# Altium PCB TOP24x_24V_FLYBACK.PcbDoc
Units mm, origin at the board's own origin, x right, y up, seen from the top; angles counter-clockwise.
Board outline 130 x 55 mm, 2 copper layers (Top Layer, Bottom Layer), stack 1.571 mm thick; 41 components, 26 nets, 110 pads, 0 vias.
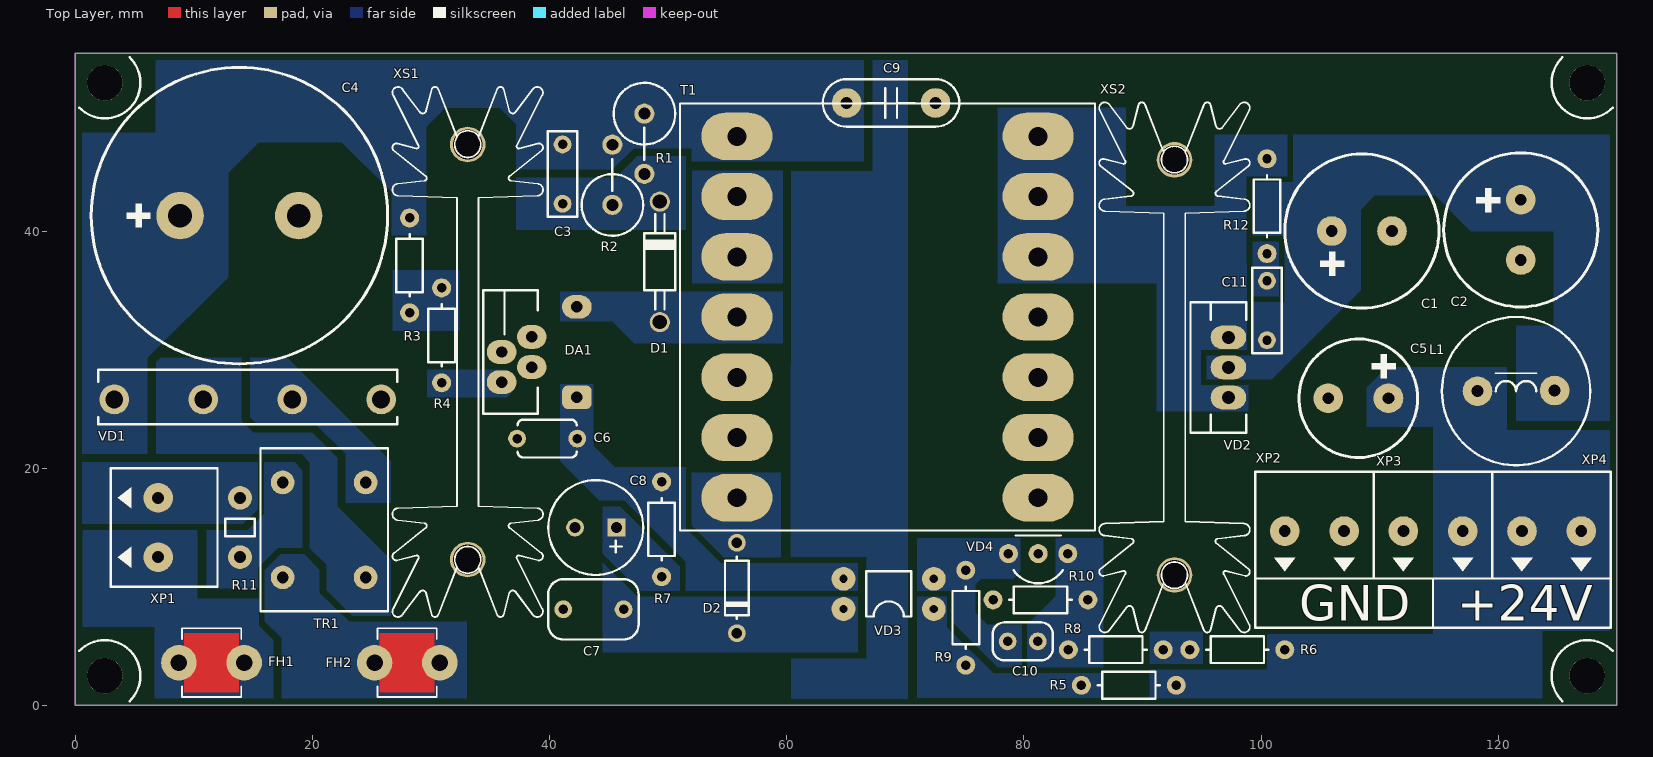
[diagram p0: Top Layer view]
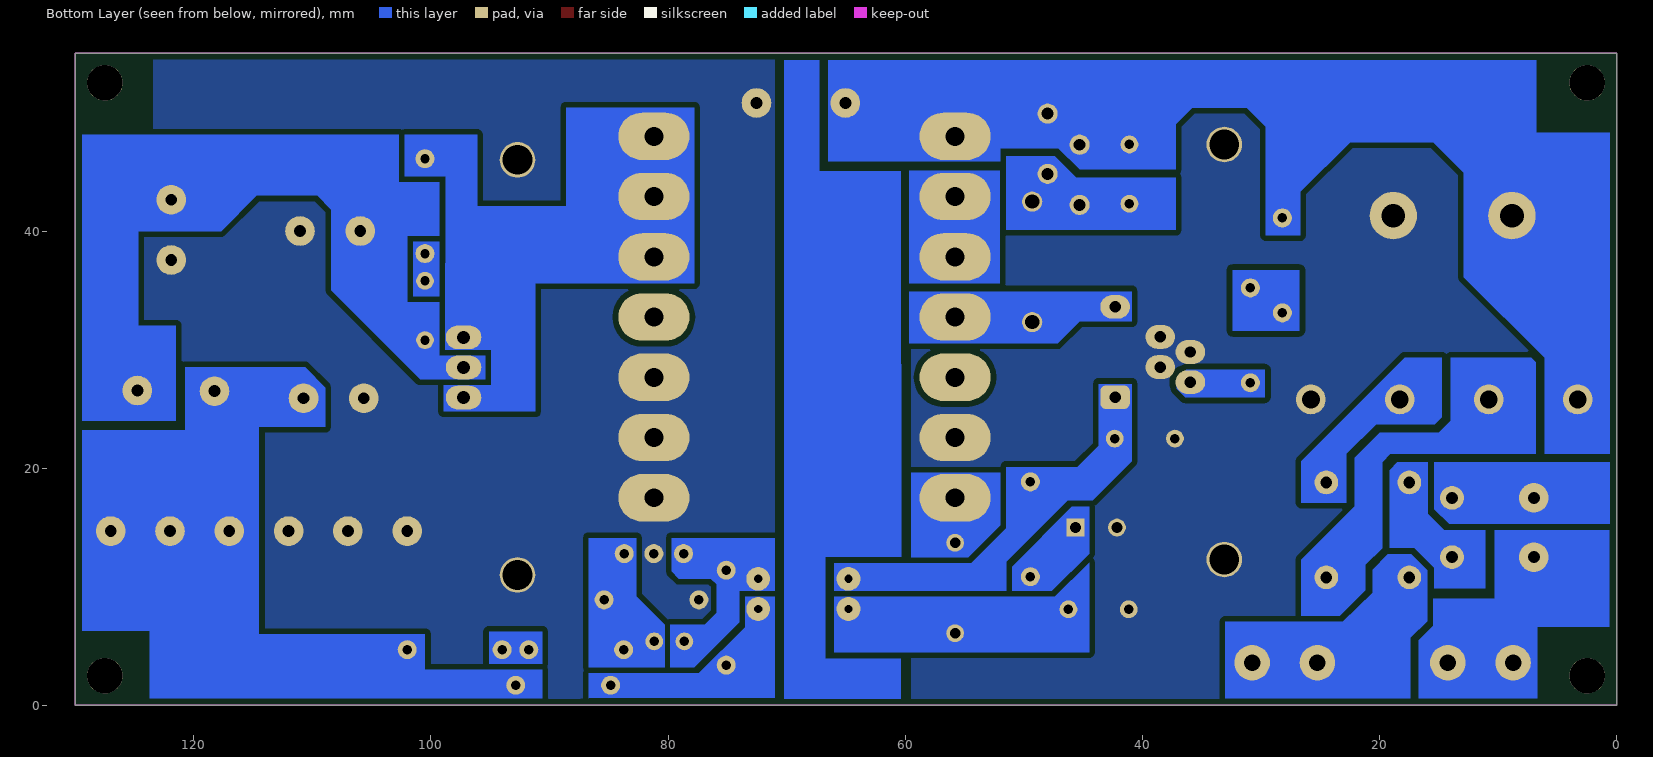
[diagram p1: Bottom Layer view, seen from below]

## Layer stack, top to bottom
Top Solder: solder mask 0.0102, Solder Resist, Dk 3.5
Top Layer: signal copper 0.0356
Dielectric 1: dielectric 1.5, FR-4, Dk 4.8
Bottom Layer: signal copper 0.0356
Bottom Solder: solder mask 0.0102, Solder Resist, Dk 3.5

## Board outline
0,0 0,55 130,55 130,0

## Design rules (kind name [scope] priority, off if disabled: settings)
Clearance Clearance_1 [All vs IsRegion] p1: gap=0.5
Clearance [All] p2: gap=0.3
Height [All] p1: minheight=0 maxheight=50 prefheight=12.7
PlaneConnect [All] p1: planeconnectstyle=Direct reliefexpansion=0.508 reliefentries=4 reliefconductorwidth=0.254 reliefairgap=0.254
PolygonConnect [All] p1: connectstyle=Direct reliefconductorwidth=0.254 reliefentries=4 polygonreliefangle="90 Angle" airgapwidth=0.254
RoutingVias [All] p1: holewidth=0.711 width=1.27 viastyle="Through Hole" minholewidth=0.711 minwidth=1.27 maxholewidth=0.711 maxwidth=1.27
SolderMaskExpansion [All] p1: expansion=0.102
Width [All] p1: maxlimit=2 minlimit=0.25 preferedwidth=0.5
27 further rules are at their usual default settings.

## Components (designator, comment, footprint, x,y, rotation, side; value= is the part's Value field where it differs from the comment)
C1 "1000uF" CAP_EL_13_20_VERT 108.5,40 r180 top
C2 "1000uF" CAP_EL_13_20_VERT 121.9,40.1 r90 top
C3 "1nF" CAPR500-250X720X650 41.1,44.8 r90 top
C4 "220uF" CAP_EL_25_40_VERT 13.85,41.3 r180 top
C5 "470uF" CAP_EL_10_19_VERT 108.2,25.9 r0 top
C6 "100nF" CAPRR508-350X500X500 39.8,22.5 r180 top
C7 "1uF" CAPRR508-508X762X914 43.7,8.1 r0 top
C8 "47uF" CAPPR350-800X1150 43.9,15 r180 top
C9 "1nF" CAP_7.5MM_Y 68.8,50.8 r0 top
C10 "33nF" CAPRR254-318X508X660 79.9,5.4 r180 top
C11 "1nF" CAPR500-250X720X650 100.5,33.3 r90 top
D1 "1N4007" DO-41 49.3,37.4 r270 top
D2 "1N4148" DO-35 55.8,9.9 r90 top
DA1 "TOP248YN" TO-220-7 38.5,29.8 r270 top
FH1 "ZH266" ZH266 11.5,3.6 r180 top
FH2 "ZH266" ZH266 28,3.6 r0 top
L1 "4.7uH" SL1016 121.5,26.5 r180 top
R1 "22k" RESADV508-1670X520 48,49.9 r270 top
R2 "22k" RESADV508-1670X520 45.3,42.2 r90 top
R3 "1M" RES_AXIAL_0_25_8 28.2,37.1 r90 top
R4 "1M" RES_AXIAL_0_25_8 30.9,31.2 r90 top
R5 "1k6" RES_AXIAL_0_25_8 88.85,1.7 r0 top
R6 "47k" RES_AXIAL_0_25_8 98,4.7 r180 top
R7 "10" RES_AXIAL_0_25_8 49.45,14.85 r90 top
R8 "33k" RES_AXIAL_0_25_8 87.75,4.7 r0 top
R9 "1k" RES_AXIAL_0_25_8 75.1,7.4 r270 top
R10 "10k" RES_AXIAL_0_25_8 81.4,8.9 r0 top
R11 "10R" B57164K 13.9,15 r270 top
R12 "5R6" RES_AXIAL_0_25_8 100.5,42.1 r270 top
T1 "ETD29" ETD29 68.5,32.75 r0 top
TR1 "22mH" CG00008A 21,14.8 r90 top
VD1 "D3SBA60" D3SBAXX 14.55,25.8 r0 top
VD2 "CTL22S" TO-220-3 97.25,28.5 r90 top
VD3 "PC817" DIP4 68.6,9.4 r180 top
VD4 "LM431AIM3" TO92 81.2,12.8 r0 top
XP1 "306-021-12" 306-021-12 7,15 r270 top
XP2 "306-021-12" 306-021-12 104.5,14.7 r0 top
XP3 "306-021-12" 306-021-12 114.5,14.7 r0 top
XP4 "306-021-12" 306-021-12 124.5,14.7 r0 top
XS1 "SK45-25S" SK45-25S 33.1,29.8 r90 top
XS2 "SK45-25S" SK45-25S 92.7,28.5 r90 top

## Footprints (in the part's own frame and the unit in brackets; to place one, negate y for a bottom-side part, rotate by r counter-clockwise, add the part's x,y. Pads: shape width x height; smd on the part's side, far side on the other; paste and mask are expansions set on the pad)
306-021-12 [mm]
  round 2.5 hole 1 unplated: 1(-2.5,0) 2(2.5,0)
  silkscreen extent -5,-4 5,5, body extent -5,-4 5,5, height 12.62
B57164K [mm]
  round 2 hole 1: 1(-2.5,0) 2(2.5,0)
  silkscreen extent -0.75,-1.25 0.75,1.25, body extent -4,-1.25 4,1.26, height 10.5
CAP_7.5MM_Y [mm]
  round 2.5 hole 1: 1(-3.75,0) 2(3.75,0)
  silkscreen extent -5.75,-2 5.75,2, body extent -6,-1.99 6,1.99, height 15.31
CAP_EL_10_19_VERT [mm]
  round 2.5 hole 1: 1(2.54,0) 2(-2.54,0)
  silkscreen extent -5,-5 5,5, body extent -5.08,-5.07 5.08,5.07, height 20.33
CAP_EL_13_20_VERT [mm]
  round 2.5 hole 1: 1(2.54,0) 2(-2.54,0)
  silkscreen extent -6.5,-6.5 6.5,6.5, body extent -6.49,-6.48 6.5,6.48, height 20.72
CAP_EL_25_40_VERT [mm]
  round 4 hole 2: 1(5,0) 2(-5,0)
  silkscreen extent -12.5,-12.5 12.5,12.5, body extent -12.7,-12.7 12.7,12.7, height 42.21
CAPPR350-800X1150 [mm] "Capacitor, Radial, Pin spacing 3.5mm - Body Diameter 8.0mm X Body Height 11.5mm"
  rect 1.5x1.5 hole 0.9: 1(-1.75,0)
  round 1.5 hole 0.9: 2(1.75,0)
  silkscreen extent -4,-4 4,4, body extent -4.01,-4.01 3.99,3.95, height 11.5
CAPR500-250X720X650 [mm] "Capacitor Radial, Pin spacing 5.0mm - Body With 2.5mm X Body Length 7.2mm X Body Height 6.5mm"
  round 1.5 hole 0.8: 1(-2.5,0) 2(2.5,0)
  silkscreen extent -3.6,-1.25 3.6,1.25, body extent -3.6,-1.25 3.6,1.25, height 6.5
CAPRR254-318X508X660 [mm] "Capacitor Radial Rounded, Pin spacing 2.54mm - Body With 3.18mm X Body Length 5.08mm X Body Height 6.6mm"
  round 1.5 hole 0.8: 1(-1.27,0) 2(1.27,0)
  silkscreen extent -2.54,-1.6 2.54,1.6, body extent -2.54,-1.59 2.54,1.59, height 6.6
CAPRR508-350X500X500 [mm] "Capacitor Radial Rounded, Pin spacing 5.08mm - Body With 3.2mm X Body Length 5.0mm X Body Height 5.0mm"
  round 1.5 hole 0.8: 1(-2.54,0) 2(2.54,0)
  silkscreen extent -2.5,-1.6 2.5,1.6, body extent -2.79,-1.75 2.79,1.75, height 5
CAPRR508-508X762X914 [mm] "Capacitor Radial Rounded, Pin spacing 5.08mm - Body With 5.08mm X Body Length 7.62mm X Body Height 9.14mm"
  round 1.5 hole 0.8: 1(-2.54,0) 2(2.54,0)
  silkscreen extent -3.81,-2.54 3.81,2.54, body extent -3.81,-2.54 3.81,2.54, height 9.14
CG00008A [mm]
  round 2 hole 1: 1(-4,-3.5) 2(-4,3.5) 3(4,3.5) 4(4,-3.5)
  silkscreen extent -6.88,-5.37 6.88,5.37, body extent -7.78,-5.43 7.78,5.43, height 15.46
D3SBAXX [mm]
  round 2.5 hole 1.5 unplated: AC1(-3.75,0) AC2(3.75,0) N(11.25,0) P(-11.25,0)
  silkscreen extent -12.6,-2.1 12.6,2.5, body extent -12.65,-2.1 12.65,2.5, height 21.3
DIP4 [mm]
  round 2 hole 0.7: 1(-3.81,1.27) 2(-3.81,-1.27) 3(3.81,-1.27) 4(3.81,1.27)
  silkscreen extent -1.91,-1.91 1.91,1.91, body extent -3.94,-2.3 3.94,2.3, height 4.3
DO-35 [mm] "Diode, Axial, Body 4.6 x 2 mm (LxDia. max), Pin spacing 7.62mm"
  round 1.5 hole 0.9: 1(-3.81,0) 2(3.81,0)
  silkscreen extent -2.6,-1 2.65,1, body extent -4.08,-0.95 4.08,0.96, height 1.91
DO-41 [mm] "DO-41, Diode, Axial, Body 4.7 x 2.7 mm (LxDia. max), Pin spacing 10.16mm"
  round 1.7 hole 1.2: 1(-5.08,0) 2(5.08,0)
  silkscreen extent -4,-1.3 4,1.3, body extent -5.48,-1.3 5.48,1.3, height 2.6
ETD29 [mm]
  oval 6x4 hole 1.6: 1(-12.7,15.24) 2(-12.7,10.16) 3(-12.7,5.08) 4(-12.7,0) 5(-12.7,-5.08) 6(-12.7,-10.16) 7(-12.7,-15.24) 8(12.7,-15.24) 9(12.7,-10.16) 10(12.7,-5.08) 11(12.7,0) 12(12.7,5.08) 13(12.7,10.16) 14(12.7,15.24)
  silkscreen extent -17.5,-18 17.5,18, body extent -17.5,-17.6 17.5,17.6, height 24.72
RES_AXIAL_0_25_8 [mm]
  round 1.6 hole 0.8: 1(-4,0) 2(4,0)
  silkscreen extent -2.63,-1.12 2.63,1.12, body extent -4.3,-1.2 4.3,1.2, height 2.7
RESADV508-1670X520 [mm] "Resistor, Axial, Vertical Mount, Lead spacing 5.08 mm - Body Lengh 16.7mm X Body Diameter 5.2mm"
  round 1.7 hole 1: 1(0,0) 2(5.08,0)
  silkscreen extent -2.6,-2.6 3.88,2.6, body extent -2.6,-2.6 5.47,2.6, height 23.6
SK45-25S [mm]
  round 3 hole 2.5: 1(-17.5,0) 2(17.5,0)
  silkscreen extent -22.35,-6.35 22.35,6.35, body extent -22.35,-6.35 22.35,6.35, height 25.41
SL1016 [mm]
  round 2.5 hole 1 unplated: 1(-3.25,-0.05) 2(3.25,0)
  silkscreen extent -6.25,-6.25 6.25,6.25, body extent -6.5,-6.5 6.5,6.5, height 20
TO92 [mm]
  round 1.6 hole 0.8: 1(-2.5,0) 2(0,0) 3(2.5,0)
  silkscreen extent -2.08,-2.5 2.08,1.52, body extent -2.76,-2.53 2.77,1.55, height 6.7
TO-220-3 [mm]
  oval 2x3 hole 1.1: 1(-2.54,0) 2(0,0) 3(2.54,0)
  silkscreen extent -5.5,-1.5 5.5,3.2, body extent -5.61,-1.5 5.61,3.19, height 19.33
TO-220-7 [mm]
  rrect50% 2x2.5 hole 0.965: 1(3.81,3.81)
  oval 2x2.5 hole 0.965: 2(2.54,-2.54) 3(1.27,0) 4(0,-2.54) 5(-1.27,0) 7(-3.81,3.81)
  silkscreen extent -5.2,-4.1 5.2,0.5, body extent -5.2,-4.1 5.2,4.03, height 19.94
ZH266 [mm]
  round 3 hole 1.4: 1(-2.75,0) 1(2.75,0)
  Top Layer region: -2.3,2.5 -2.3,-2.5 2.3,-2.5 2.3,2.5
  Top Layer pour cut-out: -3.05,2.9 -3.05,-2.9 3.05,-2.9 3.05,2.9
  Bottom Layer region: -2.75,1.5 2.75,1.5 2.75,-1.5 -2.75,-1.5
  silkscreen extent -2.5,-2.9 2.5,2.9, body extent -3.05,-2.9 3.05,2.9, height 8.28

## Part data
C1 C2: library part "SK035M1000B5S-1320 (VERT MOUNTED)"
C3 C11: library part CPER_1NF_63V_10%_500-250X720X650, "Non-polarised capacitor"
C4: library part "LG400M0220BPF-2540 (VERT MOUNTED)"
C5: library part "SH050M0470B5S-1019 (VERT MOUNTED)"
C6: library part CCR_100NF_50V_10%_X7R_508-350X500X500, "Non-polarised capacitor"
C7: library part CCR_1UF_50V_10%_X7R_508-508X762X914, "Non-polarised capacitor"
C8: library part CAER_47UF_63V_20%_350-800X1150, "Polarised capacitor"
C9: library part VKO102KCQTC0KR, "SMD 0805 Capacitor"
C10: library part CCR_33NF_100V_10%_X7R_254-318X508X660, "Non-polarised capacitor"
D1 D2: "Diode"
L1: library part SL1016T-4R7K-B-N
R1 R2: library part RMF_22K_5%_3W_250PPM_508-1670X520_v, "Resistor - 5%"
R3 R4: library part RMF_1M_1%_0.6W_50PPM_1016-630X250
R5: library part RMF_1K6_1%_0.6W_50PPM_1016-630X250
R6: library part RMF_47K_1%_0.6W_50PPM_1016-630X250
R7: library part RMF_10R_1%_0.6W_50PPM_1016-630X250
R8: library part RMF_33K_1%_0.6W_50PPM_1016-630X250
R9: library part RMF_1K_1%_0.6W_50PPM_1016-630X250
R10: library part RMF_10K_1%_0.6W_50PPM_1016-630X250
R11: library part B57164K
R12: library part RMF_5R6_1%_0.6W_50PPM_1016-630X250
TR1: library part CG00008A

## Free pads (board coordinates)
  round 3 hole 3 unplated: 3(2.5,52.5) 4(2.5,2.5) 5(127.5,2.5) 5(127.5,52.5)

## Nets (pads, with @x,y where several pads share a name; then routed paths per layer and width w, separated by ;. In a path a pad name is that pad's centre, name@x,y a point inside that pad or via, vN(x,y) a via of type N, cw(c..) or ccw(c..) an arc to the next point about the centre after c; other vN are vias at no path point)
+24V: C5.1 L1.2 R5.2 R6.1 XP3.2 XP4.1 XP4.2
AC1: FH1.1 XP1.2
AC2: R11.1 XP1.1
ACF1: TR1.1 VD1.AC1
ACF2: TR1.4 VD1.AC2
BIAS_OUT: D2.2 T1.7
GND: C1.2 C2.2 C5.2 C9.2 R10.1 T1.8 T1.9 T1.10 VD4.2 XP2.1 XP2.2 XP3.1 XS2.1 XS2.2
HVCC: C3.2 C4.1 C9.1 R1.1 R2.2 R3.2 T1.1 VD1.P
HVGND: C4.2 C6.2 C7.1 C8.2 DA1.3 DA1.4 DA1.5 T1.6 VD1.N XS1.1 XS1.2
NetC1_1: C1.1 C2.1 C11.1 L1.1 VD2.2
NetC3_1: C3.1 D1.1 R1.2 R2.1
NetC6_1: C6.1 DA1.1 R7.2 VD3.3
NetC7_2: C7.2 D2.1 VD3.4
NetC8_1: C8.1 R7.1
NetC10_1: C10.1 R8.1 R10.2 VD4.3
NetC10_2: C10.2 R9.1 VD3.2 VD4.1
NetC11_2: C11.2 R12.2
NetDA1_2: DA1.2 R4.1
NetFH2_1: FH2.1 TR1.2
NetR3_1: R3.1 R4.2
NetR5_1: R5.1 R9.2 VD3.1
NetR6_2: R6.2 R8.2
NetR11_2: R11.2 TR1.3
NetT1_2: T1.2 T1.3
TOP_D: D1.2 DA1.7 T1.4
V_OUT: R12.1 T1.12 T1.13 T1.14 VD2.1 VD2.3
pads on no net: T1.5 T1.11

## Polygon pours and split planes (outlines as drawn)
HVGND on Bottom Layer "Top Layer-No Net" (solid, remove dead copper, pour order 2): 7.5,55 59.5,55 59.5,0 7.4,0
GND on Bottom Layer "Top Layer-No Net" (solid, remove dead copper, pour order 4): 71,55 71,0.45 119.45,0.45 129.6,10.6 129.7,48.05 123.4,48.05 123.4,55

## Keep-outs
Keep-Out Layer:
  the board outline again, w0.1

## Other copper
Bottom Layer:
  region net NetC11_2: 99.3,39.1 101.5,39.1 101.5,34.5 99.3,34.5
  region net NetR6_2: 90.6,6.2 95.1,6.2 95.1,3.5 90.6,3.5
  region net HVCC: 6.8,54.4 6.8,48.3 0.6,48.3 0.6,21.2 6.1,21.2 6.1,29.3 12.9,36.1 12.9,44.9 15.5,47.5 22.5,47.5 26.7,43.3 26.7,39.65 29.6,39.65 29.6,48.8 31.2,50.4 35.8,50.4 37.2,49 37.2,45.2 45.3,45.2 47.1,47 52,47 52,45.9 66.5,45.9 66.5,54.4
  region net NetC3_1: 51.5,46.3 47.4,46.3 45.6,44.5 37.2,44.5 37.2,40.1 51.5,40.1
  region net NetR3_1: 32.4,36.7 32.4,31.6 26.8,31.6 26.8,36.7
  region net AC2: 15.4,20.5 15.4,16.55 14.15,15.3 0.6,15.3 0.6,20.5
  region net NetR11_2: 15.95,16.15 14.55,14.75 11.1,14.75 11.1,9.9 15.4,9.9 15.4,11.6 17.1,13.3 19.15,13.3 19.15,19.85 18.5,20.5 15.95,20.5
  region net AC1: 0.65,14.75 10.3,14.75 10.3,9 15.5,9 15.5,6.7 16.7,5.5 16.7,0.6 6.7,0.6 6.7,6.65 0.65,6.65
  region net NetFH2_1: 17.35,12.75 16,11.4 16,7.1 17.4,5.7 17.4,0.6 33,0.6 33,7.05 23.1,7.05 20.6,9.5 20.6,11.45 19.3,12.75
  region net ACF1: 6.85,21.2 19.1,21.2 19.8,20.5 19.8,13.25 21.2,11.85 21.2,9.7 23.35,7.55 26.6,7.55 26.6,12.3 22.1,16.8 22.1,20.9 20,23 15,23 14,24 14,29.3 7.2,29.3 6.85,28.95
  region net ACF2: 14.75,29.3 14.75,24.3 15.35,23.7 20.3,23.7 22.8,21.2 22.8,17.1 26.6,17.1 26.6,20.6 17.9,29.3
  region net NetC8_1: 44.5,12.8 47.65,9.65 51,9.65 51,11.7 45.95,16.75 44.5,16.75
  region net NetC6_1: 40.9,27.1 40.9,20.6 44.2,17.3 46.3,17.3 51.5,12.1 51.5,9.65 66,9.65 66,12 54.45,12 51.5,14.95 51.5,20.1 45.5,20.1 43.7,21.9 43.7,27.1
  region net NetC7_2: 66,9.15 47.4,9.15 44.5,12.05 44.5,4.5 66,4.5
  region net TOP_D: 59.65,34.9 40.9,34.9 40.9,32.4 45.3,32.4 47.15,30.55 59.65,30.55
  region net V_OUT: 77.8,35.6 91.2,35.6 91.2,24.8 98.9,24.8 98.9,27 94.9,27 94.9,30 98.8,30 98.77,44.61 102.19,44.61 102.2,48.1 96.1,48.1 96.1,42.1 88.6,42.1 88.6,50.4 77.8,50.4
  region net NetC1_1: 95.4,29.5 99.3,29.5 99.3,34 102,34 102,39.6 99.3,39.6 99.3,44.1 102.7,44.1 102.7,48.1 129.4,48.1 129.4,24 121.5,24 121.5,32 124.7,32 124.7,40 117.7,40 114.7,43 109.6,43 108.4,41.8 108.4,35 100.9,27.5 95.4,27.5
  region net +24V: 120.7,28.5 120.7,23.2 129.4,23.2 129.4,6.3 123.7,6.3 123.7,0.6 90.6,0.6 90.6,3 100.5,3 100.5,6 114.5,6 114.5,23.5 108.9,23.5 108.9,26.8 110.6,28.5
  region net NetR5_1: 86.7,2.7 86.7,0.6 71,0.65 71,9.15 73.5,9.15 73.5,6.6 77.4,2.7
  region net NetC10_2: 71,9.65 74,9.65 74,7 77.8,3.2 79.8,3.2 79.8,6.8 76.9,6.8 75.9,7.8 75.9,10.2 76.4,10.7 79.1,10.7 79.7,11.3 79.7,14.1 71,14.1
  region net NetC10_1: 80.3,3.2 86.7,3.2 86.7,14.1 82.7,14.1 82.7,9.2 80.3,6.8
  region net NetT1_2: 52.05,45.1 59.65,45.1 59.65,35.6 52.05,35.6
  region net NetDA1_2: 29.7,28.3 29.7,26 36.4,26 37.1,26.7 37.1,27.5 36.3,28.3
  region net BIAS_OUT: 52,19.6 59.5,19.6 59.5,12.5 54.7,12.5 52,15.2
  region: 60.4,45.05 67.25,45.05 67.25,54.4 70.2,54.4 70.2,0.55 60.4,0.55 60.4,3.95 66.75,3.95 66.75,12.55 60.35,12.55

## Silkscreen, mask and mechanical layers (free items; w line width, h text height)
Top Overlay:
  lines w0.2: 0.354,4.596 cw(c2.5,2.5) 4.596,0.354 ; 0.354,50.404 ccw(c2.5,52.5) 4.596,54.646 ; 99.5,10.7 99.5,6.55 129.5,6.55 129.5,10.7 ; 114.5,6.65 114.5,10.7 ; 125.404,0.354 cw(c127.5,2.5) 129.646,4.596 ; 125.404,54.646 ccw(c127.5,52.5) 129.646,50.404
  text "GND" at 103.2,7.15 h3
  text "+24V" at 116.55,7.15 h3